# Altium PCB PCB_DUVBot_v0.00.PcbDoc (part 2 of 2)
Units mm, origin at the board's own origin, x right, y up, seen from the top; angles counter-clockwise.
Board outline 279.5 x 67.5 mm, 2 copper layers (Top Layer, Bottom Layer), stack 1.671 mm thick; 224 components, 141 nets, 694 pads, 218 vias.
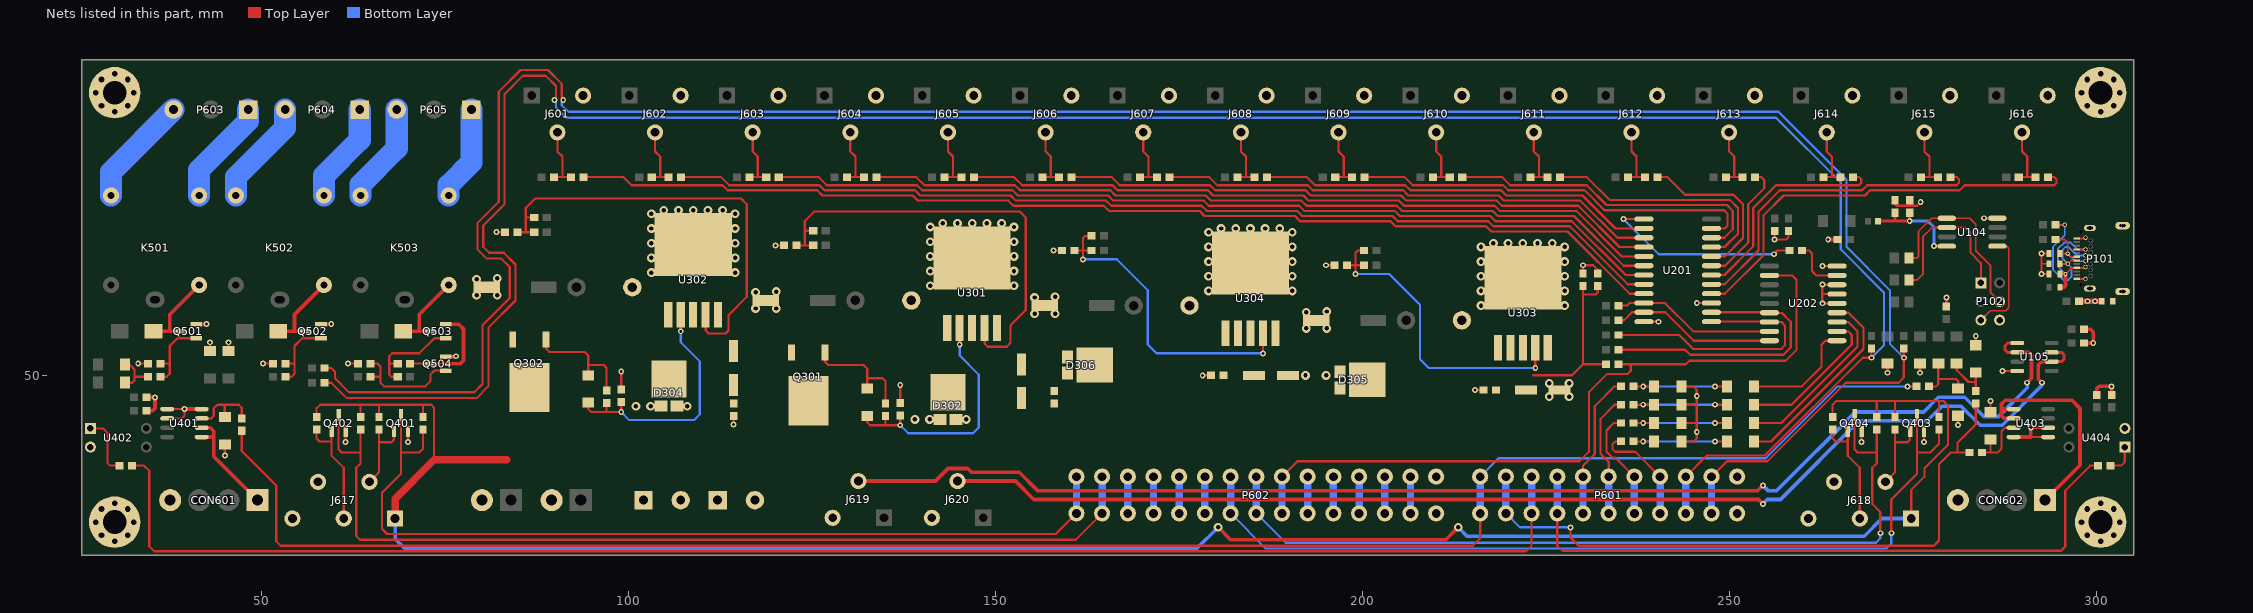
[diagram p2: the nets of this part, all layers, seen from the top]

## Via types
v1: diameter 1.2, hole 0.6, Top Layer to Bottom Layer, tented both sides, 108 vias
v2: diameter 0.8, hole 0.4, Top Layer to Bottom Layer, tented both sides, 106 vias
v3: diameter 0.6, hole 0.3, Top Layer to Bottom Layer, tented both sides, 4 vias

## Nets (pads, with @x,y where several pads share a name; then routed paths per layer and width w, separated by ;. In a path a pad name is that pad's centre, name@x,y a point inside that pad or via, vN(x,y) a via of type N, cw(c..) or ccw(c..) an arc to the next point about the centre after c; other vN are vias at no path point) (continued)
GND: C101.2 C102.2 C103.1 C104.2 C105.2 C106.2 C201.2 C202.2 C203.2 C204.2 C301.2 C302.2 C303.2 C304.2 C305.2 C306.2 C307.2 C308.2 C309.2 C311.2 C313.2 C315.2 C401.2 C402.2 C403.2 C404.2 CON601.4 CON602.4 CON603.2 CON604.2 D302.1 D304.1 D305.1 D306.1 DZ101.1 DZ102.1 DZ103.1 DZ104.1 DZ205.1 DZ206.1 DZ207.1 DZ208.1 DZ401.1 DZ402.1 DZ506.1 DZ507.1 J601.3 J602.3 J603.3 J604.3 J605.3 J606.3 J607.3 J608.3 J609.3 J610.3 J611.3 J612.3 J613.3 J614.3 J615.3 J616.3 J617.4 J617.5 J618.4 J618.5 J619.3 J620.3 L102.1 P101.A1 P101.A12 P101.B1 P101.B12 P102.6 P302.1 P302.2 P601.11 P602.15 pad.0 pad.1 pad.2 pad.3 pad.4 pad.5 pad.6 pad.7 Q401.2 Q402.2 Q403.2 Q404.2 Q501.2 Q502.2 Q504.2 R107.2 R302.2 R304.2 R306.2 R308.2 R310.2 R312.2 R502.2 R504.2 R508.2 TOR101.1 TOR102.1 TOR103.1 TOR104.1 U101.2 U102.2 U103.2 U104.4 U105.4 U201.12 U201.15 U202.5 U202.6 U202.7 U202.9 U301.3 U301.5 U301.6 U302.3 U302.5 U302.6 U303.3 U303.5 U303.6 U304.3 U304.5 U304.6 U401.4 U401.5 U401.6 U402.2 U403.4 U403.5 U403.6 U404.2 | length 127.2
  Top Layer w0.254: v2(292.469,63.8) 292.469,65.2 ; v2@292.569,63.9 292.669,63.8 U101.2@293.519,63.8 ; U102.2@293.519,65.2 292.469,65.2 ; U103.2@293.519,66.6 v2(292.469,66.6) 292.469,65.2 ; P101.A1@297.259,63.14 P101.B12@298.369,63.14 ; P101.A12@297.259,68.64 298.369,68.64 P101.B1@298.419,68.69
  Top Layer w0.3: v2(33.2,51.6) R502.2@34.55,51.6 ; U401.6@37.15,44.135 39.135,44.135 39.5,44.5 v2(39.5,45.4) 38.325,45.405 U401.5@37.15,45.405 ; DZ506.1@43,53.3 v2(43,54.5) ; v2(45,39.1) DZ401.1@45,40.6 ; DZ507.1@45.5,53.3 v2(45.5,54.5) ; v2(50.2,51.6) R504.2@51.55,51.6 ; v2(61.45,40.9) Q402.2@61.45,42.4 ; v2(61.8,51.6) R508.2@63.15,51.6 ; v2(69.95,40.9) Q401.2@69.95,42.4 ; v2(82,69.5) R308.2@83.15,69.5 ; R306.2@99,48.05 v2(99,50.5) ; v2(114.3,43.3) C302.2@114.3,44.45 ; v2(120,67.7) R304.2@121.15,67.7 ; R302.2@137,46.25 v2(137,48.7) ; v2(157.9,67) R312.2@159.05,67 ; v2(178.2,50) C306.2@179.35,50 ; v2(195,65) R310.2@196.15,65 ; v2(215.3,48) C308.2@216.45,48 ; C203.2@230,63.85 v2(230,65) 231.4,65 232,64.4 C204.2@232,63.85 ; U201.12@238.3,57.315 240.285,57.315 v2(240.3,57.3) ; DZ208.1@243.4,41 245.1,41 245.5,41.4 245.5,43.5 ; DZ207.1@243.4,43.5 245.5,43.5 ; DZ206.1@243.4,46 245.5,46 ; DZ205.1@243.4,48.5 245,48.5 245.5,48 245.5,46 ; v2(245.5,59.87) 245.515,59.855 U201.15@247.5,59.855 ; C201.2@256.1,69.65 256.1,68.5 257.7,68.5 258,68.8 C202.2@258,69.65 ; v2(262.6,64.895) 262.615,64.88 U202.9@264.6,64.88 ; U202.5@264.6,59.8 262.615,59.8 v2(262.6,59.815) 262.6,61.085 ; U202.6@264.6,61.07 262.615,61.07 262.6,61.085 ; U202.7@264.6,62.34 262.615,62.34 v2(262.6,62.355) 262.6,61.085 ; v2(267.95,40.9) Q404.2@267.95,42.4 ; C102.2@272.5,73.85 272.5,73.304 272.7,73.104 274.5,73.104 ; C103.1@274.5,73.85 274.5,73.104 ; v2(276,73.6) 275.504,73.104 274.5,73.104 ; v2(276.45,40.9) Q403.2@276.45,42.4 ; v2(284.6,71.405) U104.4@286.45,71.405 ; DZ402.1@285.5,45 v2(285.5,46.5) ; v2(287.15,50.61) 287.165,50.595 U105.4@289.15,50.595 ; 291,42.5 291,41.6 292.175,41.595 U403.5@293.35,41.595 ; v2@291,42.865 U403.6@293.35,42.865 ; 245.5,43.5 245.5,46
  Top Layer w0.4: v2@271.495,50.45 271.5,50.455 DZ101.1@271.5,51.6 ; v2@275.895,50.45 275.9,50.455 DZ102.1@275.9,51.6 ; R107.2@279.5,59.35 279.5,60.495 v2@279.505,60.5 ; v2@281.095,43.35 281.1,43.355 DZ103.1@281.1,44.5 ; DZ104.1@283.5,54.1 283.5,55.245 v2@283.505,55.25 ; P101.B12@298.369,63.14 P101.B12@298.419,63.19
  Top Layer w0.5: C402.2@34.35,45.2 35.2,45.2 35.5,45.5 v2(35.5,47) C401.2@34.35,47 ; v2(39.5,45.4) 39.505,45.405 U401.4@41.85,45.405 ; Q501.2@41.1,56.95 v2@42.45,56.95 ; Q502.2@58.1,56.95 v2@59.45,56.95 ; Q504.2@75.1,52.55 v2@76.45,52.55 ; v2(263.4,68.5) C104.2@264.65,68.5 ; U403.4@288.65,41.595 290.995,41.595 ; 291,41.6 290.995,41.595 ; v2(291,42.9) 290.995,42.895 290.995,41.595 ; C105.2@298.25,54.4 v2(299.5,54.4) 299.5,55.9 299.1,56.3 C106.2@298.25,56.3 ; C403.2@300,47.35 300,48.2 300.3,48.5 v2(302,48.5) C404.2@302,47.35
  Top Layer w0.7: C101.2@297.619,60.09 L102.1@300.669,60.09
  other v1: 139,44 141,44 146,44 101,45.8 103,45.8 108,45.8 225.4,47.1 228.1,47.1 225.4,48.9 228.1,48.9 192.2,50 195,50 192.3,56.4 195.1,56.4 155.3,58.4 158.1,58.4 192.3,58.6 195.1,58.7 117.3,59.1 120.1,59.1 216.1,59.5 227.5,59.5 155.3,60.6 158.1,60.7 79.3,60.9 82.1,60.9 117.3,61.3 120.1,61.4 179,61.5 190.4,61.5 216.1,61.5 227.5,61.5 141.1,62.2 152.5,62.2 79.3,63.1 82.1,63.2 179,63.5 190.4,63.5 216.1,63.5 227.5,63.5 103.1,64 114.5,64 141.1,64.2 152.5,64.2 179,65.5 190.4,65.5 216.1,65.5 227.5,65.5 103.1,66 114.5,66 141.1,66.2 152.5,66.2 179,67.5 190.4,67.5 216.1,67.5 227.5,67.5 103.1,68 114.5,68 217.8,68 219.8,68 221.8,68 223.8,68 225.8,68 141.1,68.2 152.5,68.2 179,69.5 190.4,69.5 103.1,70 114.5,70 180.7,70 182.7,70 184.7,70 186.7,70 188.7,70 141.1,70.2 152.5,70.2 142.8,70.7 144.8,70.7 146.8,70.7 148.8,70.7 150.8,70.7 103.1,72 114.5,72 104.8,72.5 106.8,72.5 108.8,72.5 110.8,72.5 112.8,72.5
  other v2: 245.5,42.3 281.1,43.25 245.5,47.2 271.5,50.35 275.9,50.35 76.5,52.6 283.5,55.35 42.5,57 59.5,57 298.719,60.09 299.719,60.09 279.5,60.6 256.085,68.515
M0: R201.2 U201.9 | length 151
  Top Layer w0.3: R201.2@93.85,77 99.3,77 100.4,75.9 112.8,75.9 113.5,75.2 125.7,75.2 126.4,74.5 138.72,74.5 139.42,73.8 151.73,73.8 152.43,73.1 164.74,73.1 165.44,72.4 177.75,72.4 178.45,71.7 190.76,71.7 191.46,71 203.77,71 204.47,70.3 216.8,70.3 217.5,69.6 227.9,69.6 236.375,61.125 U201.9@238.3,61.125
M1: R202.2 U201.8 | length 137.2
  Top Layer w0.3: R202.2@107.15,77 112.6,77 113.7,75.9 125.99,75.9 126.69,75.2 139.01,75.2 139.71,74.5 152.02,74.5 152.72,73.8 165.03,73.8 165.73,73.1 178.04,73.1 178.74,72.4 191.05,72.4 191.75,71.7 204.06,71.7 204.76,71 217.09,71 217.79,70.3 228.19,70.3 236.095,62.395 U201.8@238.3,62.395
M2: R203.2 U201.7 | length 123.4
  Top Layer w0.3: R203.2@120.45,77 125.9,77 127,75.9 139.3,75.9 140,75.2 152.31,75.2 153.01,74.5 165.32,74.5 166.02,73.8 178.33,73.8 179.03,73.1 191.34,73.1 192.04,72.4 204.35,72.4 205.05,71.7 217.38,71.7 218.08,71 228.48,71 235.815,63.665 U201.7@238.3,63.665
M3: R204.2 U201.6 | length 109.5
  Top Layer w0.3: R204.2@133.75,77 139.2,77 140.3,75.9 152.6,75.9 153.3,75.2 165.61,75.2 166.31,74.5 178.62,74.5 179.32,73.8 191.63,73.8 192.33,73.1 204.64,73.1 205.34,72.4 217.67,72.4 218.37,71.7 228.77,71.7 235.535,64.935 U201.6@238.3,64.935
M4: R205.2 U201.5 | length 95.7
  Top Layer w0.3: R205.2@147.05,77 152.5,77 153.6,75.9 165.9,75.9 166.6,75.2 178.91,75.2 179.61,74.5 191.92,74.5 192.62,73.8 204.93,73.8 205.63,73.1 217.96,73.1 218.66,72.4 229.06,72.4 235.255,66.205 U201.5@238.3,66.205
M5: R206.2 U201.4 | length 81.9
  Top Layer w0.3: R206.2@160.35,77 165.8,77 166.9,75.9 179.2,75.9 179.9,75.2 192.21,75.2 192.91,74.5 205.22,74.5 205.92,73.8 218.25,73.8 218.95,73.1 229.35,73.1 234.975,67.475 U201.4@238.3,67.475
M6: R207.2 U201.3 | length 68.1
  Top Layer w0.3: R207.2@173.65,77 179.1,77 180.2,75.9 192.5,75.9 193.2,75.2 205.51,75.2 206.21,74.5 218.54,74.5 219.24,73.8 229.64,73.8 234.695,68.745 U201.3@238.3,68.745
M7: R208.2 U201.2 | length 54.2
  Top Layer w0.3: R208.2@186.95,77 192.4,77 193.5,75.9 205.8,75.9 206.5,75.2 218.83,75.2 219.53,74.5 229.93,74.5 234.415,70.015 U201.2@238.3,70.015
M8: R209.2 U201.23 | length 55.5
  Top Layer w0.3: R209.2@200.25,77 205.7,77 206.8,75.9 219.12,75.9 219.82,75.2 230.22,75.2 232.92,72.5 249.2,72.5 249.7,72 249.7,70.4 249.315,70.015 U201.23@247.5,70.015
M9: R210.2 U201.22 | length 44.6
  Top Layer w0.3: R210.2@213.55,77 219,77 220.1,75.9 230.51,75.9 233.21,73.2 249.6,73.2 250.4,72.4 250.4,69.9 249.245,68.745 U201.22@247.5,68.745
M10: R211.2 U201.21 | length 33.8
  Top Layer w0.3: R211.2@226.85,77 230.5,77 233.6,73.9 250,73.9 251.1,72.8 251.1,69.3 249.275,67.475 U201.21@247.5,67.475
M11: R212.2 U201.20 | length 23.1
  Top Layer w0.3: R212.2@240.15,77 241.5,77 243.9,74.6 250.5,74.6 251.8,73.3 251.8,68.7 249.3,66.2 247.505,66.2 U201.20@247.5,66.205
M12: R213.2 U201.19 | length 17.1
  Top Layer w0.3: U201.19@247.5,64.935 249.335,64.935 252.5,68.1 252.5,73.3 254.7,75.5 254.7,76.6 254.3,77 R213.2@253.45,77
M13: R214.2 U201.18 | length 30.4
  Top Layer w0.3: U201.18@247.5,63.665 249.265,63.665 253.2,67.6 253.2,72.8 256.3,75.9 267.6,75.9 267.9,76.2 267.9,76.7 267.6,77 R214.2@266.75,77
M14: R215.2 U201.17 | length 44.3
  Top Layer w0.3: U201.17@247.5,62.395 249.295,62.395 253.9,67 253.9,72.3 256.8,75.2 268,75.2 268.7,75.9 280.9,75.9 281.2,76.2 281.2,76.7 280.9,77 R215.2@280.05,77
M15: R216.2 U201.16 | length 58.2
  Top Layer w0.3: U201.16@247.5,61.125 249.325,61.125 254.6,66.4 254.6,71.8 257.3,74.5 268.4,74.5 269.1,75.2 281.3,75.2 282,75.9 294.2,75.9 294.5,76.2 294.5,76.7 294.2,77 R216.2@293.35,77
MISO: CON102.2 P102.1 U104.6 | length 22
  Top Layer w0.254: CON102.2@274.416,63 275.5,63 276.3,63.8 276.3,68.9 277.535,70.135 U104.6@279.55,70.135 282.065,70.135 282.8,69.4 282.8,66.7 284.2,65.3 P102.1@284.2,62.6
MOSI: CON101.2 P102.4 U104.5 | length 25.5
  Top Layer w0.254: CON101.2@274.416,66 275.5,66 275.7,66.2 275.7,69.6 277.505,71.405 U104.5@279.55,71.405 282.695,71.405 283.5,70.6 283.5,67 285.5,65 285.5,61.3 P102.4@286.74,60.06
MUX_OUT: R237.1 U201.1 | length 27.7
  Top Layer w0.3: v2(235.5,71.3) 235.515,71.285 U201.1@238.3,71.285 ; v2(256,66.5) 256.5,67 R237.1@258.15,67
  Bottom Layer w0.3: v2(235.5,71.3) 240.3,66.5 v2(256,66.5)
NC_SW1: K501.2 P603.3 | length 15.2
  Bottom Layer w3: K501.2@29.5,74.5 29.5,77.68 P603.3@38.02,86.2
NC_SW2: K502.2 P604.3 | length 14.5
  Bottom Layer w3: K502.2@46.5,74.5 46.5,77 53.22,83.72 P604.3@53.22,86.2
NC_SW3: K503.2 P605.3 | length 13.7
  Bottom Layer w3: K503.2@63.5,74.5 63.5,76 68.42,80.92 P605.3@68.42,86.2
NetC102_1: C102.1 C103.2 L103.1 U104.8 | length 14.6
  Top Layer w0.4: L103.1@270.2,71 272.5,71 ; C102.1@272.5,72.15 272.5,71 ; C103.2@274.5,72.15 v2(274.5,71) 272.5,71 ; v2(277.8,67.6) 277.805,67.595 U104.8@279.55,67.595
  Bottom Layer w0.4: v2(274.5,71) 277,71 277.8,70.2 v2(277.8,67.6)
NetC310_2: C310.2 R303.2 R304.1 U301.4 | length 61.7
  Top Layer w0.3: R304.1@122.85,67.7 124,67.7 ; R303.2@125.15,67.7 124,67.7 ; C310.2@125.15,69.7 124,69.7 ; U301.4@148.5,56.45 148.5,54.3 148.9,53.9 151.5,53.9 152,54.4 152,56.8 154.1,58.9 154.1,71.5 153.3,72.3 125.3,72.3 124,71 124,69.7 ; 124,67.7 124,69.7
NetC312_2: C312.2 R307.2 R308.1 U302.4 | length 61.5
  Top Layer w0.3: R308.1@84.85,69.5 86,69.5 ; R307.2@87.15,69.5 86,69.5 ; C312.2@87.15,71.5 86,71.5 ; U302.4@110.5,58.25 110.5,56.1 110.9,55.7 113.2,55.7 113.6,56.1 113.6,58.2 116.1,60.7 116.1,73.3 115.3,74.1 87.3,74.1 86,72.8 86,71.5 ; 86,69.5 86,71.5
NetC314_2: C314.2 R309.2 R310.1 U303.4 | length 43.4
  Top Layer w0.3: R310.1@197.85,65 199,65 ; v2(199,63.8) 199,65 ; R309.2@200.15,65 199,65 ; C314.2@200.15,67 199.3,67 199,66.7 199,65 ; v2(223.5,51) U303.4@223.5,53.75
  Bottom Layer w0.3: v2(199,63.8) 203.6,63.8 207.8,59.6 207.8,52.2 209,51 v2(223.5,51)
NetC316_2: C316.2 R311.2 R312.1 U304.4 | length 43.4
  Top Layer w0.3: R312.1@160.75,67 161.9,67 ; v2(161.9,65.8) 161.9,67 ; R311.2@163.05,67 161.9,67 ; C316.2@163.05,69 162.2,69 161.9,68.7 161.9,67 ; v2(186.4,53) U304.4@186.4,55.75
  Bottom Layer w0.3: v2(161.9,65.8) 166.5,65.8 170.7,61.6 170.7,54.2 171.9,53 v2(186.4,53)
NetD105_1: D105.1 DZ103.2 R105.2 | length 8
  Top Layer w0.3: R105.2@277.15,48.5 278.1,48.5 278.4,48.8 278.4,49.5 ; D105.1@278.4,51.6 278.4,49.5 ; DZ103.2@281.1,48.21 281.1,49.2 280.8,49.5 278.4,49.5
NetD106_1: D106.1 DZ104.2 R106.2 | length 6.7
  Top Layer w0.3: D106.1@280.9,51.6 280.9,50.7 282.5,49.1 283.5,49.1 ; R106.2@283.5,47.85 283.5,49.1 ; DZ104.2@283.5,50.39 283.5,49.1
NetD201_1: D201.1 DZ205.2 R233.2 | length 14.2
  Top Layer w0.3: R233.2@236.85,48.5 v2(238.2,48.5) DZ205.2@239.69,48.5 ; v2(248,48.5) D201.1@249.6,48.5
  Bottom Layer w0.3: v2(238.2,48.5) v2(248,48.5)
NetD201_2: D201.2 U202.1 | length 15.6
  Top Layer w0.3: D201.2@253.31,48.5 259.8,48.5 262.5,51.2 262.5,54.2 263.02,54.72 U202.1@264.6,54.72
NetD202_1: D202.1 DZ206.2 R234.2 | length 14.2
  Top Layer w0.3: R234.2@236.85,46 v2(238.2,46) DZ206.2@239.69,46 ; v2(248,46) D202.1@249.6,46
  Bottom Layer w0.3: v2(238.2,46) v2(248,46)
NetD202_2: D202.2 U202.2 | length 20.2
  Top Layer w0.3: D202.2@253.31,46 258.4,46 266.6,54.2 266.6,55.5 266.11,55.99 U202.2@264.6,55.99
NetD203_1: D203.1 DZ207.2 R235.2 | length 14.2
  Top Layer w0.3: R235.2@236.85,43.5 v2(238.2,43.5) DZ207.2@239.69,43.5 ; v2(248,43.5) D203.1@249.6,43.5
  Bottom Layer w0.3: v2(238.2,43.5) v2(248,43.5)
NetD203_2: D203.2 U202.3 | length 23.8
  Top Layer w0.3: D203.2@253.31,43.5 257,43.5 267.4,53.9 267.4,56 266.14,57.26 U202.3@264.6,57.26
NetD204_1: D204.1 DZ208.2 R236.2 | length 14.2
  Top Layer w0.3: R236.2@236.85,41 v2(238.2,41) DZ208.2@239.69,41 ; v2(248,41) D204.1@249.6,41
  Bottom Layer w0.3: v2(238.2,41) v2(248,41)
NetD204_2: D204.2 U202.4 | length 27.4
  Top Layer w0.3: D204.2@253.31,41 255.6,41 268.2,53.6 268.2,56.5 266.17,58.53 U202.4@264.6,58.53
NetD301_1: D301.1 Q301.1 R301.1 | length 15.8
  Top Layer w0.3: Q301.1@126.78,53.1 126.78,51.82 127.2,51.4 132,51.4 132.5,50.9 132.5,49.55 ; D301.1@132.5,48.2 132.5,49.55 ; R301.1@135,46.15 135,49.2 134.6,49.6 132.55,49.6 132.5,49.55
NetD301_2: D301.2 R301.2 R302.1 U301.2 | length 34.3
  Top Layer w0.3: D301.2@132.5,44.49 132.5,43.6 132.9,43.2 135,43.2 ; R301.2@135,44.45 135,43.2 ; R302.1@137,44.55 v2(137,43.2) 135,43.2 ; v2(145.1,54.2) U301.2@145.1,56.45
  Bottom Layer w0.3: v2(137,43.2) 138.1,42.1 146.9,42.1 147.7,42.9 147.7,50.1 145.1,52.7 v2(145.1,54.2)
NetD302_2: D302.2 L301.1 Q301.3
NetD303_1: D303.1 Q302.1 R305.1 | length 15.8
  Top Layer w0.3: Q302.1@88.78,54.9 88.78,53.62 89.2,53.2 94,53.2 94.5,52.7 94.5,51.35 ; D303.1@94.5,50 94.5,51.35 ; R305.1@97,47.95 97,51 96.6,51.4 94.55,51.4 94.5,51.35
NetD303_2: D303.2 R305.2 R306.1 U302.2 | length 34.3
  Top Layer w0.3: D303.2@94.5,46.29 94.5,45.4 94.9,45 97,45 ; R305.2@97,46.25 97,45 ; R306.1@99,46.35 v2(99,45) 97,45 ; v2(107.1,56) U302.2@107.1,58.25
  Bottom Layer w0.3: v2(99,45) 100.1,43.9 108.9,43.9 109.7,44.7 109.7,51.9 107.1,54.5 v2(107.1,56)
NetD304_2: D304.2 L302.1 Q302.3
NetD305_2: D305.2 L303.1 U303.2
NetD306_2: D306.2 L304.1 U304.2
NetD501_2: D501.2 D502.2 R501.2 | length 6.3
  Top Layer w0.3: D502.2@31.41,49 32.4,49 32.7,49.3 32.7,49.8 ; D501.2@31.41,51.5 32,51.5 32.7,50.8 32.7,49.8 ; R501.2@34.55,49.8 32.7,49.8
NetD503_1: D503.1 K501.5 Q501.3 | length 11.6
  Top Layer w0.5: D503.1@35.286,56 37.5,56 ; Q501.3@38.9,56 37.5,56 ; K501.5@41.5,62.3 37.5,58.3 37.5,56
NetD504_1: D504.1 K502.5 Q502.3 | length 11.6
  Top Layer w0.5: D504.1@52.286,56 54.5,56 ; Q502.3@55.9,56 54.5,56 ; K502.5@58.5,62.3 54.5,58.3 54.5,56
NetD505_1: D505.1 K503.5 Q503.3 | length 11.6
  Top Layer w0.5: D505.1@69.286,56 71.5,56 ; Q503.3@72.9,56 71.5,56 ; K503.5@75.5,62.3 71.5,58.3 71.5,56
NetDZ401_2: DZ401.2 R409.2 U401.3 | length 10.1
  Top Layer w0.3: U401.3@41.85,44.135 43.135,44.135 43.5,44.5 43.5,45.5 44,46 45,46 ; DZ401.2@45,44.31 45,46 ; R409.2@47.3,44.15 47.3,45.6 46.9,46 45,46
NetDZ402_2: DZ402.2 R410.2 U403.3 | length 8.9
  Top Layer w0.3: R410.2@284.35,39.5 285.5,39.5 ; DZ402.2@285.5,41.29 285.5,39.5 ; U403.3@288.65,42.865 287.465,42.865 287,42.4 287,40 286.5,39.5 285.5,39.5
NetL101_1: L101.1 P101.A4 P101.A9 P101.B4 P101.B9 U101.1 | length 15.5
  Top Layer w0.254: U101.1@295.019,63.79 v3(295.719,63.79) 296.569,64.64 297.259,64.64 298.269,64.64 P101.B9@298.319,64.69 ; P101.A9@297.259,67.14 298.369,67.14 P101.B4@298.419,67.09
  Top Layer w0.5: L101.1@295.119,61.99 295.519,61.99 295.719,62.19 v3(295.719,63.79)
  Bottom Layer w0.254: v3(295.719,63.79) 294.719,64.79 294.719,67.29 295.519,68.09 296.419,68.09 297.369,67.14 P101.B4@298.469,67.14
NetL102_2: L102.2 P101.S1 P101.S2 P101.S3 P101.S4
NetP101_A6: P101.A6 P101.B6 R101.2 U102.1 | length 21.6
  Top Layer w0.254: R101.2@294.369,70.5 v3(295.619,70.5) ; U102.1@295.119,65.19 v3(296.019,65.19) 296.469,65.64 P101.A6@297.259,65.64
  Bottom Layer w0.254: v3(295.619,70.5) 295.619,69.1 294.019,67.5 294.019,64.4 295.419,63 296.119,63 296.519,63.4 296.519,64.69 v3(296.019,65.19) 295.319,65.89 295.319,67.09 295.719,67.49 296.119,67.49 297.269,66.34 P101.B6@298.469,66.34
NetP101_A7: P101.A7 P101.B7 R102.2 U103.1 | length 8.5
  Top Layer w0.254: R102.2@294.369,68.5 295.619,68.5 296.019,68.1 v3(296.019,66.59) ; U103.1@295.119,66.59 v3(296.019,66.59) ; P101.A7@297.259,66.14 296.469,66.14 v3(296.019,66.59)
  Bottom Layer w0.254: v3(296.019,66.59) 297.069,65.54 P101.B7@298.469,65.54
NetQ501_1: Q501.1 R501.1 R502.1 | length 10.5
  Top Layer w0.3: R501.1@36.25,49.8 37.1,49.8 37.5,50.2 37.5,51.6 ; R502.1@36.25,51.6 37.5,51.6 ; Q501.1@41.1,55.05 38.55,55.05 37.5,54 37.5,51.6
NetQ502_1: Q502.1 R503.1 R504.1 | length 10.5
  Top Layer w0.3: R503.1@53.25,49.8 54.1,49.8 54.5,50.2 54.5,51.6 ; R504.1@53.25,51.6 54.5,51.6 ; Q502.1@58.1,55.05 55.55,55.05 54.5,54 54.5,51.6
NetQ503_1: Q503.1 R505.1 R506.1 | length 13.6
  Top Layer w0.3: R505.1@68.55,49.8 67.7,49.8 67.4,50.1 67.4,51.6 ; R506.1@68.55,51.6 67.4,51.6 ; Q503.1@75.1,55.05 73.55,55.05 71.5,53 67.8,53 67.4,52.6 67.4,51.6
NetQ503_2: Q503.2 Q504.3 R506.2 | length 14.4
  Top Layer w0.3: R506.2@70.25,51.6 Q504.3@72.9,51.6
  Top Layer w0.5: Q504.3@72.9,51.6 77.1,51.6 77.5,52 77.5,56.3 76.85,56.95 Q503.2@75.1,56.95
NetQ504_1: Q504.1 R507.1 R508.1 | length 15.6
  Top Layer w0.3: R507.1@64.85,49.8 66.2,49.8 ; R508.1@64.85,51.6 65.8,51.6 66.2,51.2 66.2,49.8 ; Q504.1@75.1,50.65 73.55,50.65 73,50.1 73,49.2 72.3,48.5 66.7,48.5 66.2,49 66.2,49.8
NetR237_2: R237.2 U202.8 | length 7.6
  Top Layer w0.3: R237.2@259.85,67 260.8,67 261.2,66.6 261.2,64.2 261.79,63.61 U202.8@264.6,63.61
NetR411_1: R411.1 U402.1 | length 8.5
  Top Layer w0.3: U402.1@26.69,42.77 28.43,42.77 29,42.2 29,38.1 29.4,37.7 R411.1@30.65,37.7
NetR412_1: R412.1 U404.1 | length 4.2
  Top Layer w0.3: R412.1@301.85,37.7 303.3,37.7 303.8,38.2 303.8,40.22 U404.1@303.81,40.23
NO_SW1: K501.3 P603.1 | length 14.5
  Bottom Layer w3: K501.3@41.5,74.5 41.5,78 48.18,84.68 P603.1@48.18,86.2
NO_SW2: K502.3 P604.1 | length 13.7
  Bottom Layer w3: K502.3@58.5,74.5 58.5,77.2 63.38,82.08 P604.1@63.38,86.2
NO_SW3: K503.3 P605.1 | length 13
  Bottom Layer w3: K503.3@75.5,74.5 75.5,75.9 78.58,78.98 P605.1@78.58,86.2
PLC_I0: P602.1 Q401.3 R402.2 | length 123.5
  Top Layer w0.3: Q401.3@69,44.6 69,39.5 ; R402.2@72,42.65 72,40 71.5,39.5 69,39.5 ; P602.1@161,31.2 158.2,28.4 67.1,28.4 66.4,29.1 66.4,34 69,36.6 69,39.5
  Bottom Layer w1: P602.1@161,31.2 P602.1@161,36.2
PLC_I1: P602.2 Q402.3 R404.2 | length 131
  Top Layer w0.3: Q402.3@60.5,44.6 60.5,39.9 60.9,39.5 63.5,39.5 ; R404.2@63.5,42.65 63.5,39.5 ; P602.2@164.5,31.2 160.9,27.6 63.4,27.6 62.9,28.1 62.9,37.4 63.5,38 63.5,39.5
  Bottom Layer w1: P602.2@164.5,31.2 P602.2@164.5,36.2
PLC_I2: P602.3 | length 5
  Bottom Layer w1: P602.3@168,31.2 P602.3@168,36.2
PLC_I3: P602.4 | length 5
  Bottom Layer w1: P602.4@171.5,31.2 P602.4@171.5,36.2
PLC_I4: P602.5 | length 5
  Bottom Layer w1: P602.5@175,31.2 P602.5@175,36.2
PLC_I5: P602.6 | length 5
  Bottom Layer w1: P602.6@178.5,31.2 P602.6@178.5,36.2
PLC_I6: P602.7 Q403.3 R406.2 | length 121.7
  Top Layer w0.3: v2(272,28.5) 272,33.1 275.5,36.6 275.5,39.5 ; Q403.3@275.5,44.6 275.5,39.5 ; R406.2@278.5,42.65 278.5,40.7 277.3,39.5 275.5,39.5
  Bottom Layer w0.3: P602.7@182,31.2 186.8,26.4 271.3,26.4 272,27.1 v2(272,28.5)
  Bottom Layer w1: P602.7@182,31.2 P602.7@182,36.2
PLC_I7: P602.8 Q404.3 R408.2 | length 115.3
  Top Layer w0.3: Q404.3@267,44.6 267,39.9 267.4,39.5 270,39.5 ; R408.2@270,42.65 270,39.5 ; v2(270.5,28.5) 270.5,31.4 269.4,32.5 269.4,37.4 270,38 270,39.5
  Bottom Layer w0.3: P602.8@185.5,31.2 189.5,27.2 269.9,27.2 270.5,27.8 v2(270.5,28.5)
  Bottom Layer w1: P602.8@185.5,31.2 P602.8@185.5,36.2
PLC_I8: P602.9 R242.1 U202.11 | length 102.6
  Top Layer w0.3: P602.9@189,36.2 191.1,38.3 229.5,38.3 230.8,39.6 230.8,47.7 233.3,50.2 236.1,50.2 236.5,50.6 236.5,51.5 ; R242.1@234.85,51.5 236.5,51.5 ; U202.11@255.4,63.61 255.41,63.6 258.5,63.6 259.1,63 259.1,53.5 257.6,52 244.5,52 244,51.5 236.5,51.5
  Bottom Layer w1: P602.9@189,31.2 P602.9@189,36.2
PLC_I9: P602.10 | length 5
  Bottom Layer w1: P602.10@192.5,31.2 P602.10@192.5,36.2
PLC_I10: P602.11 | length 5
  Bottom Layer w1: P602.11@196,31.2 P602.11@196,36.2
PLC_I11: P602.12 | length 5
  Bottom Layer w1: P602.12@199.5,31.2 P602.12@199.5,36.2
PLC_I12: P602.13 | length 5
  Bottom Layer w1: P602.13@203,31.2 P602.13@203,36.2
PLC_I13: P602.14 | length 5
  Bottom Layer w1: P602.14@206.5,31.2 P602.14@206.5,36.2
PLC_Q0: P601.1 R105.1 R409.1 | length 254.5
  Top Layer w0.3: R409.1@47.3,42.45 47.3,39.7 52,35 52,27.4 52.6,26.8 215,26.8 216,27.8 P601.1@216,31.2 ; v2@274.305,48.5 R105.1@275.45,48.5
  Top Layer w0.4: v2@274.3,48.505 v2@274.305,48.5
  Bottom Layer w0.3: P601.1@216,36.2 218.5,38.7 254.9,38.7 264.7,48.5 v2(274.2,48.5)
  Bottom Layer w1: P601.1@216,31.2 P601.1@216,36.2
PLC_Q1: P601.2 R106.1 R410.1 | length 89.8
  Top Layer w0.3: v2(228.3,29.3) 228.3,27.9 229.4,26.8 277.8,26.8 278.5,27.5 278.5,37.9 280.1,39.5 281,39.5 ; R410.1@282.65,39.5 281,39.5 ; R106.1@283.5,46.15 283.5,43.3 281,40.8 281,39.5
  Bottom Layer w0.3: P601.2@219.5,31.2 221.4,29.3 v2(228.3,29.3)
  Bottom Layer w1: P601.2@219.5,31.2 P601.2@219.5,36.2
PLC_Q2: P601.3 R411.2 | length 211.2
  Top Layer w0.3: R411.2@32.35,37.7 34,37.7 34.7,37 34.7,26.731 35.4,26.031 222.231,26.031 223,26.8 P601.3@223,31.2
  Bottom Layer w1: P601.3@223,31.2 P601.3@223,36.2
PLC_Q3: P601.4 R412.2 | length 92.6
  Top Layer w0.3: P601.4@226.5,31.2 226.5,26.8 227.2,26.1 295.1,26.1 295.7,26.7 295.7,34.3 299.1,37.7 R412.2@300.15,37.7
  Bottom Layer w1: P601.4@226.5,31.2 P601.4@226.5,36.2
PLC_Q4: P601.5 R233.1 | length 19.9
  Top Layer w0.3: P601.5@230,36.2 230,37.7 231.6,39.3 231.6,45.8 234.3,48.5 R233.1@235.15,48.5
  Bottom Layer w1: P601.5@230,31.2 P601.5@230,36.2
PLC_Q5: P601.6 R234.1 | length 16.9
  Top Layer w0.3: P601.6@233.5,36.2 233.5,38.2 232.4,39.3 232.4,44.1 234.3,46 R234.1@235.15,46
  Bottom Layer w1: P601.6@233.5,31.2 P601.6@233.5,36.2
PLC_Q6: P601.7 R235.1 | length 15.5
  Top Layer w0.3: R235.1@235.15,43.5 234.2,43.5 233.2,42.5 233.2,39.6 234,38.8 234.4,38.8 P601.7@237,36.2
  Bottom Layer w1: P601.7@237,31.2 P601.7@237,36.2
PLC_Q7: P601.8 R236.1 | length 15
  Top Layer w0.3: R236.1@235.15,41 234.4,41 234,40.6 234,40 234.4,39.6 237.1,39.6 P601.8@240.5,36.2
  Bottom Layer w1: P601.8@240.5,31.2 P601.8@240.5,36.2
PLC_Q8: P601.9 R103.1 R509.1 | length 325.5
  Top Layer w0.3: R509.1@58.55,49 59.5,49 61.6,46.9 79.3,46.9 80.9,48.5 80.9,56.5 84.6,60.2 84.6,65.1 83,66.7 81,66.7 80.2,67.5 80.2,70.4 83.1,73.3 83.1,88.3 85.6,90.8 88.7,90.8 90.1,89.4 90.1,87.7 v2(89.9,87.5) ; P601.9@244,36.2 246.9,39.1 254.8,39.1 268.1,52.4 v2(269.3,52.4) ; v2@269.3,52.505 R103.1@269.3,53.65
  Top Layer w0.4: v2@269.295,52.5 v2@269.3,52.505
  Bottom Layer w0.3: v2(89.9,87.5) 90.1,87.3 90.1,86.469 91.469,85.1 256.3,85.1 265.1,76.3 265.1,67.169 271,61.269 271,54.1 v2(269.3,52.4)
  Bottom Layer w1: P601.9@244,31.2 P601.9@244,36.2
PLC_Q9: P601.10 R104.1 R510.1 | length 330.5
  Top Layer w0.3: R510.1@58.55,51 59.5,51 60,50.5 60,49.6 61.9,47.7 78.969,47.7 80.1,48.831 80.1,56.831 83.8,60.531 83.8,64.769 82.669,65.9 80.669,65.9 79.4,67.169 79.4,70.731 82.3,73.631 82.3,88.631 85.269,91.6 89.031,91.6 90.9,89.731 90.9,87.7 v2(91.1,87.5) ; P601.10@247.5,36.2 249.6,38.3 255.1,38.3 265.8,49 273,49 273.7,49.7 v2(273.7,52.4) ; v2@273.7,52.505 R104.1@273.7,53.65
  Top Layer w0.4: v2@273.695,52.5 v2@273.7,52.505
  Bottom Layer w0.3: v2(91.1,87.5) 90.9,87.3 90.9,86.8 91.8,85.9 256.631,85.9 265.9,76.631 265.9,67.5 271.8,61.6 271.8,56.1 271.8,54.3 v2(273.7,52.4)
  Bottom Layer w1: P601.10@247.5,31.2 P601.10@247.5,36.2
PWMDRIVER0: CON601.1 U401.1 U401.2 | length 15.4
  Top Layer w0.5: U401.1@41.85,41.595 43.495,41.595 43.5,41.6 ; U401.2@41.85,42.865 43.035,42.865 43.5,42.4 43.5,41.6 ; CON601.1@49.444,33 43.5,38.944 43.5,41.6
PWMDRIVER1: CON602.1 U403.1 U403.2 | length 30.9
  Top Layer w0.5: U403.2@288.65,44.135 287.365,44.135 287,44.5 287,45.4 ; U403.1@288.65,45.405 287.005,45.405 287,45.4 ; CON602.1@292.944,33 297.7,37.756 297.7,45.5 296.6,46.6 287.5,46.6 287,46.1 287,45.4
RESET: P102.5 U104.1 | length 14.3
  Top Layer w0.254: P102.5@284.2,57.52 285.48,58.8 287.6,58.8 288,59.2 288,67.3 287.705,67.595 U104.1@286.45,67.595
S0: R238.1 U201.10 U202.17 | length 22.3
  Top Layer w0.3: R238.1@234.85,59.5 236,59.5 236.355,59.855 U201.10@238.3,59.855 241.145,59.855 245.01,55.99 U202.17@255.4,55.99
S1: R239.1 U201.11 U202.18 | length 22.6
  Top Layer w0.3: R239.1@234.85,57.5 235.6,57.5 236.685,58.585 U201.11@238.3,58.585 241.215,58.585 245.08,54.72 U202.18@255.4,54.72
S2: R240.1 U201.14 U202.15 | length 39
  Top Layer w0.3: R240.1@234.85,53.5 243.9,53.5 244.6,52.8 257.3,52.8 258.3,53.8 258.3,57.3 257.1,58.5 255.43,58.5 U202.15@255.4,58.53 255.345,58.585 U201.14@247.5,58.585
S3: R241.1 U201.13 U202.16 | length 36.6
  Top Layer w0.3: R241.1@234.85,55.5 243.1,55.5 245,53.6 257,53.6 257.5,54.1 257.5,56.8 257.04,57.26 U202.16@255.4,57.26 255.345,57.315 U201.13@247.5,57.315
SENS_IR_0: J601.2 R201.1 R224.2 | length 8.7
  Top Layer w0.3: R224.2@89.85,77 91,77 ; J601.2@90.3,83.1 90.3,80.5 91,79.8 91,77 ; R201.1@92.15,77 91,77
SENS_IR_1: J602.2 R202.1 R223.2 | length 8.7
  Top Layer w0.3: R223.2@103.15,77 104.3,77 ; J602.2@103.6,83.1 103.6,80.5 104.3,79.8 104.3,77 ; R202.1@105.45,77 104.3,77
SENS_IR_2: J603.2 R203.1 R222.2 | length 8.7
  Top Layer w0.3: R222.2@116.45,77 117.6,77 ; J603.2@116.9,83.1 116.9,80.5 117.6,79.8 117.6,77 ; R203.1@118.75,77 117.6,77
SENS_IR_3: J604.2 R204.1 R221.2 | length 8.7
  Top Layer w0.3: R221.2@129.75,77 130.9,77 ; J604.2@130.2,83.1 130.2,80.5 130.9,79.8 130.9,77 ; R204.1@132.05,77 130.9,77
SENS_IR_4: J605.2 R205.1 R220.2 | length 8.7
  Top Layer w0.3: R220.2@143.05,77 144.2,77 ; J605.2@143.5,83.1 143.5,80.5 144.2,79.8 144.2,77 ; R205.1@145.35,77 144.2,77
SENS_IR_5: J606.2 R206.1 R219.2 | length 8.7
  Top Layer w0.3: R219.2@156.35,77 157.5,77 ; J606.2@156.8,83.1 156.8,80.5 157.5,79.8 157.5,77 ; R206.1@158.65,77 157.5,77
SENS_IR_6: J607.2 R207.1 R218.2 | length 8.7
  Top Layer w0.3: R218.2@169.65,77 170.8,77 ; J607.2@170.1,83.1 170.1,80.5 170.8,79.8 170.8,77 ; R207.1@171.95,77 170.8,77
SENS_IR_7: J608.2 R208.1 R217.2 | length 8.7
  Top Layer w0.3: R217.2@182.95,77 184.1,77 ; J608.2@183.4,83.1 183.4,80.5 184.1,79.8 184.1,77 ; R208.1@185.25,77 184.1,77
SENS_IR_8: J609.2 R209.1 R232.2 | length 8.7
  Top Layer w0.3: R232.2@196.25,77 197.4,77 ; J609.2@196.7,83.1 196.7,80.5 197.4,79.8 197.4,77 ; R209.1@198.55,77 197.4,77
SENS_IR_9: J610.2 R210.1 R231.2 | length 8.7
  Top Layer w0.3: R231.2@209.55,77 210.7,77 ; J610.2@210,83.1 210,80.5 210.7,79.8 210.7,77 ; R210.1@211.85,77 210.7,77
SENS_IR_10: J611.2 R211.1 R230.2 | length 8.7
  Top Layer w0.3: R230.2@222.85,77 224,77 ; J611.2@223.3,83.1 223.3,80.5 224,79.8 224,77 ; R211.1@225.15,77 224,77
SENS_IR_11: J612.2 R212.1 R229.2 | length 8.7
  Top Layer w0.3: R229.2@236.15,77 237.3,77 ; J612.2@236.6,83.1 236.6,80.5 237.3,79.8 237.3,77 ; R212.1@238.45,77 237.3,77
SENS_IR_12: J613.2 R213.1 R228.2 | length 8.7
  Top Layer w0.3: R228.2@249.45,77 250.6,77 ; J613.2@249.9,83.1 249.9,80.5 250.6,79.8 250.6,77 ; R213.1@251.75,77 250.6,77
SENS_IR_13: J614.2 R214.1 R227.2 | length 8.7
  Top Layer w0.3: R227.2@262.75,77 263.9,77 ; J614.2@263.2,83.1 263.2,80.5 263.9,79.8 263.9,77 ; R214.1@265.05,77 263.9,77
SENS_IR_14: J615.2 R215.1 R226.2 | length 8.7
  Top Layer w0.3: R226.2@276.05,77 277.2,77 ; J615.2@276.5,83.1 276.5,80.5 277.2,79.8 277.2,77 ; R215.1@278.35,77 277.2,77
SENS_IR_15: J616.2 R216.1 R225.2 | length 8.7
  Top Layer w0.3: R225.2@289.35,77 290.5,77 ; J616.2@289.8,83.1 289.8,80.5 290.5,79.8 290.5,77 ; R216.1@291.65,77 290.5,77
SIG_LED0: J619.2 U105.1 U105.2 | length 180.6
  Top Layer w0.4: U105.2@289.15,53.135 287.835,53.135 287.5,53.47 287.5,54.07 287.835,54.405 U105.1@289.15,54.405
  Top Layer w0.5: J619.2@131.3,35.6 141.8,35.6 143.5,37.3 146.2,37.3 146.7,36.8 153.2,36.8 155.7,34.3 253.8,34.3 v2(254.5,35) ; U105.2@289.15,53.135 290.665,53.135 291.1,52.7 291.1,49.6 v2(290.5,49)
  Bottom Layer w0.5: v2(254.5,35) 255.2,34.3 256.403,34.3 267.103,45 276.403,45 278.403,47 281.997,47 284.597,44.4 286.6,44.4 290.5,48.3 v2(290.5,49)
SIG_LED1: J620.2 U105.6 U105.7 | length 167
  Top Layer w0.4: U105.6@293.85,51.865 295.165,51.865 295.5,52.2 295.5,52.8 295.165,53.135 U105.7@293.85,53.135
  Top Layer w0.5: J620.2@144.8,35.6 152.7,35.6 155.2,33.1 253.9,33.1 v2(254.5,32.5) ; v2(292.5,49) 292,49.5 292,51.4 292.465,51.865 U105.6@293.85,51.865
  Bottom Layer w0.5: v2(254.5,32.5) 255.1,33.1 256.9,33.1 267.6,43.8 276.9,43.8 278.9,45.8 281.5,45.8 284.1,43.2 287.097,43.2 292.5,48.603 v2(292.5,49)
SIGNAL_A_E0: J617.2 Q401.1 R401.2 | length 11
  Top Layer w0.3: J617.2@64.7,35.5 66,36.8 66,40.9 ; R401.2@66,42.65 66,40.9 ; Q401.1@68.05,42.4 68.05,41.25 67.7,40.9 66,40.9
SIGNAL_A_E1: J618.2 Q403.1 R405.2 | length 11
  Top Layer w0.3: J618.2@271.2,35.5 272.5,36.8 272.5,40.9 ; R405.2@272.5,42.65 272.5,40.9 ; Q403.1@274.55,42.4 274.55,41.25 274.2,40.9 272.5,40.9
SIGNAL_B_E0: J617.3 Q402.1 R403.2 | length 16
  Top Layer w0.3: R403.2@57.5,42.65 57.5,41.4 57.9,41 59.55,41 ; Q402.1@59.55,42.4 59.55,41 ; J617.3@61.2,30.5 61.2,37.4 59.55,39.05 59.55,41
SIGNAL_B_E1: J618.3 Q404.1 R407.2 | length 16
  Top Layer w0.3: R407.2@264,42.65 264,41.4 264.4,41 266.05,41 ; Q404.1@266.05,42.4 266.05,41 ; J618.3@267.7,30.5 267.7,37.4 266.05,39.05 266.05,41
VCC: C203.1 C204.1 C301.1 C302.1 C303.1 C304.1 C305.1 C306.1 C307.1 C308.1 J617.1 J618.1 P301.1 P301.2 Q301.4 Q302.4 R242.2 R401.1 R402.1 R403.1 R404.1 R405.1 R406.1 R407.1 R408.1 U301.1 U302.1 U303.1 U304.1 | length 329.4
  Top Layer w0.3: R403.1@57.5,44.35 57.5,45.5 58,46 63.5,46 ; R404.1@63.5,44.35 63.5,46 ; R401.1@66,44.35 66,46 ; R402.1@72,44.35 72,46 ; 73.5,38.5 73.5,45.6 73.1,46 72,46 ; 223.2,50 228.5,50 230,51.5 ; C203.1@230,62.15 230,61 ; C204.1@232,62.15 232,61.3 231.7,61 230,61 ; R242.2@233.15,51.5 230,51.5 ; R407.1@264,44.35 264,46 264.5,46.5 270,46.5 ; R408.1@270,44.35 270,46.5 ; R405.1@272.5,44.35 272.5,46.5 ; J618.1@274.7,30.5 274.7,34.4 276.5,36.2 276.5,37.3 279.7,40.5 279.7,45.9 279.1,46.5 278.5,46.5 ; R406.1@278.5,44.35 278.5,46.5 ; 63.5,46 66,46 ; 66,46 72,46 ; 230,51.5 230,61 ; 270,46.5 272.5,46.5 ; 272.5,46.5 278.5,46.5
  Top Layer w0.5: v1(180.3,29.3) 182,27.6 211.3,27.6 212.7,29 v1@213,29
  Top Layer w1: J617.1@68.2,30.5 68.2,33.2 73.5,38.5 83.4,38.5
  Bottom Layer w0.5: J617.1@68.2,30.5 68.2,27.7 69.5,26.4 177.4,26.4 v1(180.3,29.3) ; v1(213,29.3) 214.2,28.1 268.3,28.1 270.7,30.5 J618.1@274.7,30.5
pads on no net: P101.A2 P101.A3 P101.A5 P101.A8 P101.A10 P101.A11 P101.B2 P101.B3 P101.B5 P101.B8 P101.B10 P101.B11 P101.None U202.10 U202.12 U202.13 U202.14 U401.7 U403.7
copper on no net:
  other v2: 315.05,56.485

## Polygon pours and split planes (outlines as drawn)
GND on Bottom Layer "GND_Bottom" (solid, pour order 2): 305,93 305,25.5 25.5,25.5 25.5,93

## Keep-outs
Keep-Out Layer:
  the board outline again, w0.254

## Other copper
Top Layer:
  region net NetL102_2: 298.619,70.49 ccw(c298.619,70.09) 298.219,70.09 ccw(c298.719,70.09) 298.719,69.59 299.919,69.59 cw(c299.919,68.99) 300.519,68.99 300.519,62.99 cw(c299.819,62.99) 299.819,62.29 298.719,62.29 ccw(c298.719,61.79) 298.219,61.79 ccw(c298.619,61.79) 298.619,61.39 301.419,61.39 301.719,61.09 301.719,59.49 301.919,59.29 304.619,59.29 304.619,71.09 302.019,71.09 301.419,70.49
  region net VCC: 104.9,58.4 104.9,56.5 104.7,56.3 104.7,55 106.7,53 108.2,53 109,52.2 109,46.7 109.5,46.2 109.5,44.7 108.8,44 94.5,44 93,45.5 93,52 92.5,52.5 83.5,52.5 83,52 83,37.5 84,36.5 94.5,36.5 99.5,31.5 108.8,31.5 109.3,32 109.3,34 110.3,35 121.5,35 124.2,37.7 125.8,37.7 126,37.9 126,38.3 126.7,39 128.2,39 129.2,38 189.5,38 190.5,39 222.5,39 223.5,40 223.5,50 222,51.5 219.3,51.5 218.9,51.9 218.9,53.8 217.9,53.8 217.9,51.9 217.4,51.4 217.4,47 216.9,46.5 195.8,46.5 193.8,48.5 188.2,48.5 187.5,49.2 187.5,51.5 187,52 186.4,52 184.9,53.5 182.2,53.5 181.8,53.9 181.8,55.8 180.8,55.8 180.8,53.9 180.3,53.4 180.3,49 179.8,48.5 159.3,48.5 159,48.2 159,47 158.6,46.6 157.4,46.6 157,47 157,48.3 156.3,49 152.7,49 152,49.7 152,52.7 151.5,53.2 145.1,53.2 143.9,54.4 143.9,56.5 142.9,56.5 142.9,54.4 142.7,54.2 142.7,53.2 144.7,51.2 146.2,51.2 147,50.4 147,44.9 147.5,44.4 147.5,43 146.7,42.2 132.5,42.2 131.2,43.5 131.2,50.1 130.6,50.7 121.5,50.7 121,50.2 121,43.3 120.2,42.5 114.1,42.5 113.3,43.3 113.3,45.2 113.7,45.6 114.8,45.6 115,45.8 115,51 113.6,51 112.8,51.8 112.8,54.9 112.6,55.1 110.6,55.1 110.4,55.3 106.8,55.3 105.9,56.2 105.9,58.4
  region net GND: 190.8,58.1 191.5,57.4 191.5,51.5 191,51 188.5,51 188,50.5 188,49.5 188.5,49 194,49 196,47 197.6,47 197.6,54.6 198.5,55.5 198.5,59 198,59.5 191.9,59.5 191.4,60
  region net GND: 221.3,53.7 221.3,57.5 220.3,58.5 215.6,58.5 214.5,59.6 208.1,59.6 203.3,64.4 203.3,68.5 203.8,69 227.6,69 228.5,68.1 228.5,56.5 228,56 226.2,56 225.7,55.5 225.7,53.7 224.7,53.7 224.7,56 224.2,56.5 222.8,56.5 222.3,56 222.3,53.7
  region net NetD305_2: 198.2,47 212.3,47 217.3,52 217.3,55.6 217.7,56 219.2,56 219.6,55.6 219.6,53.7 220.6,53.7 220.6,55.6 220.8,55.8 220.8,57.2 220.1,57.9 215.4,57.9 214.2,59.1 208,59.1 208,55.7 207.3,55 198.7,55 198.2,54.5
  region net +5V3A: 201.1,67.5 201.1,64.2 199,62.1 199,55.5 207,55.5 207.5,56 207.5,59.6 202.9,64.2 202.9,67.4 202.6,67.7 201.3,67.7
  region net GND: 154.7,58.6 152.6,56.5 152.6,49.9 153,49.5 156.5,49.5 157.5,48.5 157.5,47.3 158.5,47.3 158.5,48.4 159.2,49.1 158.7,49.6 158.7,53.6 154.7,57.6
  region net GND: 115,54.2 119.3,58.5 120.5,58.5 120.7,58.7 120.7,61.7 120.2,62.2 117.2,62.2 116.7,61.7 116.7,60.4 114.2,57.9 114.2,55.8 113.3,54.9 113.3,52 113.8,51.5 115,51.5
  region net NetD306_2: 161.1,49 175.2,49 180.2,54 180.2,57.6 180.6,58 182.1,58 182.5,57.6 182.5,55.7 183.5,55.7 183.5,57.6 183.7,57.8 183.7,59.2 183,59.9 178.3,59.9 177.1,61.1 170.9,61.1 170.9,57.7 170.2,57 161.6,57 161.1,56.5
  region net GND: 160.5,56.8 161.4,57.7 161.4,61 160.9,61.5 155.1,61.5 154.6,61 154.6,57.5 158.6,53.5 158.6,49.5 159.1,49 160.5,49
  region net GND: 184.2,55.7 184.2,59.5 183.2,60.5 178.5,60.5 177.4,61.6 171,61.6 166.2,66.4 166.2,70.5 166.7,71 190.5,71 191.4,70.1 191.4,58.5 190.9,58 189.1,58 188.6,57.5 188.6,55.7 187.6,55.7 187.6,58 187.1,58.5 185.7,58.5 185.2,58 185.2,55.7
  region net +9V3A: 164,69.5 164,66.2 161.9,64.1 161.9,57.5 169.9,57.5 170.4,58 170.4,61.6 165.8,66.2 165.8,69.4 165.5,69.7 164.2,69.7
  region net +5V: 124.7,58.2 124.3,58.2 120.5,54.4 120.5,43.5 120,43 116,43 115.5,43.5 115.5,54 119.5,58 120.7,58 121.2,58.5 121.2,60.5 121.7,61 123.5,61 124,61.5 124.1,61.5
  region net GND: 138.5,44.7 138,44.2 138,43.2 138.5,42.7 146.5,42.7 147,43.2 147,44.2 146.5,44.7
  region net GND: 146.3,56.4 146.3,58.7 145.8,59.2 141,59.2 140.5,59.7 140.5,61.3 139.5,62.3 133.1,62.3 128.3,67.1 128.3,71.2 128.8,71.7 153,71.7 153.5,71.2 153.5,59.2 153,58.7 151.2,58.7 150.7,58.2 150.7,56.4 149.7,56.4 149.7,58.7 149.2,59.2 147.8,59.2 147.3,58.7 147.3,56.4
  region net NetD302_2: 121.5,51.2 121,51.7 121,54.2 124.5,57.7 132.2,57.7 133,58.5 133,61.8 139.3,61.8 139.9,61.2 139.9,59.6 140.8,58.7 141.7,58.7 142.2,58.2 142.2,53 144.5,50.7 146,50.7 146.5,50.2 146.5,45.7 146,45.2 138.5,45.2 138,45.7 138,49.2 137,50.2 133.7,50.2 133.2,50.7 133.2,51.2 132.3,52.1 128.3,52.1 127.8,52.6 127.8,54.4 127.4,54.8 126.1,54.8 125.7,54.4 125.7,51.7 125.2,51.2
  region net +5V: 126.1,70.2 126.1,66.9 124,64.8 124,58.7 124.5,58.2 132,58.2 132.5,58.7 132.5,62.3 127.9,66.9 127.9,70.1 127.6,70.4 126.3,70.4
  region net GND: 100.5,46.5 100,46 100,45 100.5,44.5 108.5,44.5 109,45 109,46 108.5,46.5
  region net NetD304_2: 83.5,53 83,53.5 83,57.5 85,59.5 94.2,59.5 95,60.3 95,63.6 101.3,63.6 101.9,63 101.9,61.4 102.8,60.5 103.7,60.5 104.2,60 104.2,54.8 106.5,52.5 108,52.5 108.5,52 108.5,47.5 108,47 100.5,47 100,47.5 100,51 99,52 95.7,52 95.2,52.5 95.2,53 94.3,53.9 90.3,53.9 89.8,54.4 89.8,56.2 89.4,56.6 88.1,56.6 87.7,56.2 87.7,53.5 87.2,53
  region net GND: 108.3,58.2 108.3,60.5 107.8,61 103,61 102.5,61.5 102.5,63.1 101.5,64.1 95.1,64.1 90.3,68.9 90.3,73 90.8,73.5 115,73.5 115.5,73 115.5,61 115,60.5 113.2,60.5 112.7,60 112.7,58.2 111.7,58.2 111.7,60.5 111.2,61 109.8,61 109.3,60.5 109.3,58.2
  region net +12V: 88.1,72 88.1,68.7 86,66.6 86,60.5 86.5,60 94,60 94.5,60.5 94.5,64.1 89.9,68.7 89.9,71.9 89.6,72.2 88.3,72.2

## Silkscreen, mask and mechanical layers (free items; w line width, h text height)
Top Overlay:
  circle w0.15: c185,40.7 r0.6
  lines w0.254: 267.8,58.5 267.8,70 275.9,70 275.9,58.5 267.8,58.5
  text "UVC_LAMP_1" at 36.1,91.2 h2.5
  text "UVC_LAMP_2" at 51.2,91.2 h2.5
  text "UVC_LAMP_3" at 66.4,91.2 h2.5
  text "IR_1" at 87.5,91.2 h2.5
  text "IR_2" at 100.8,91.2 h2.5
  text "IR_3" at 114.1,91.2 h2.5
  text "IR_4" at 127.4,91.2 h2.5
  text "IR_5" at 140.7,91.2 h2.5
  text "IR_6" at 154,91.2 h2.5
  text "IR_7" at 167.3,91.2 h2.5
  text "IR_8" at 180.6,91.2 h2.5
  text "IR_9" at 193.9,91.2 h2.5
  text "IR_10" at 206.8,91.2 h2.5
  text "IR_11" at 220,91.2 h2.5
  text "IR_12" at 233.3,91.2 h2.5
  text "IR_13" at 246.6,91.2 h2.5
  text "IR_14" at 259.9,91.2 h2.5
  text "IR_15" at 273.2,91.2 h2.5
  text "IR_16" at 286.5,91.2 h2.5
  text "INPUTS" at 268.5,68.1 h1.2
  text "B0" at 268.4,65.3 h1.52
  text "B1" at 268.4,62.2 h1.52
  text "B2" at 268.4,59.2 h1.52
  text "designed by" at 173.4,46.1 h1
  text "R" at 184.8,40.4 h0.6
  text "DUVBot Expansion Board V1.00 - 11/2020" at 193.2,40 h1.52
  text "RGB_0" at 128.5,26.2 h2.5
  text "RGB_1" at 142,26.2 h2.5
  text "DRIVER_0" at 38.1,26.1 h2.5
  text "ENCODER_0" at 55.3,26.1 h2.5
  text "V_RASP" at 77.6,26.1 h2.5
  text "V_ROUT" at 87,26.1 h2.5
  text "++ VCC_IN - -" at 102.5,26.1 h2.5
  text "PLC_INPUTS" at 176.7,26.1 h2.5
  text "PLC_OUTPUTS" at 225.5,26.1 h2.5
  text "ENCODER_1" at 262.2,26.1 h2.5
  text "DRIVER_1" at 281.8,26.1 h2.5
Bottom Overlay:
  circle w0.15: c220.3,50.7 r0.6
  text "designed by" at 232.6,56.5 h1
  text "R" at 220.5,50.4 h0.6
  text "DUVBot Expansion Board V1.00 - 11/2020" at 273.6,39.7 h1.52

## Text inside footprints (layer, text, board x,y; h text height)
P101: Mechanical 4 "B1" at 300.975,68.059 h1.2 r90; Mechanical 4 "A1" at 297.165,61.836 h1.2 r90
P102: Top Overlay "6" at 286.232,55.996 h1.27 r270; Top Overlay "5" at 283.692,55.996 h1.27 r270; Top Overlay "2" at 286.232,65.14 h1.27 r270; Top Overlay "1" at 283.692,64.632 h1.27 r270